# Altium PCB PCB2.PcbDoc
Units mm, origin at the board's own origin, x right, y up, seen from the top; angles counter-clockwise.
Board outline 102.36 x 81.91 mm, 2 copper layers (Top Layer, Bottom Layer); 10 components, 30 nets, 158 pads, 0 vias.
Unrouted connection lines stored in the file: 30.
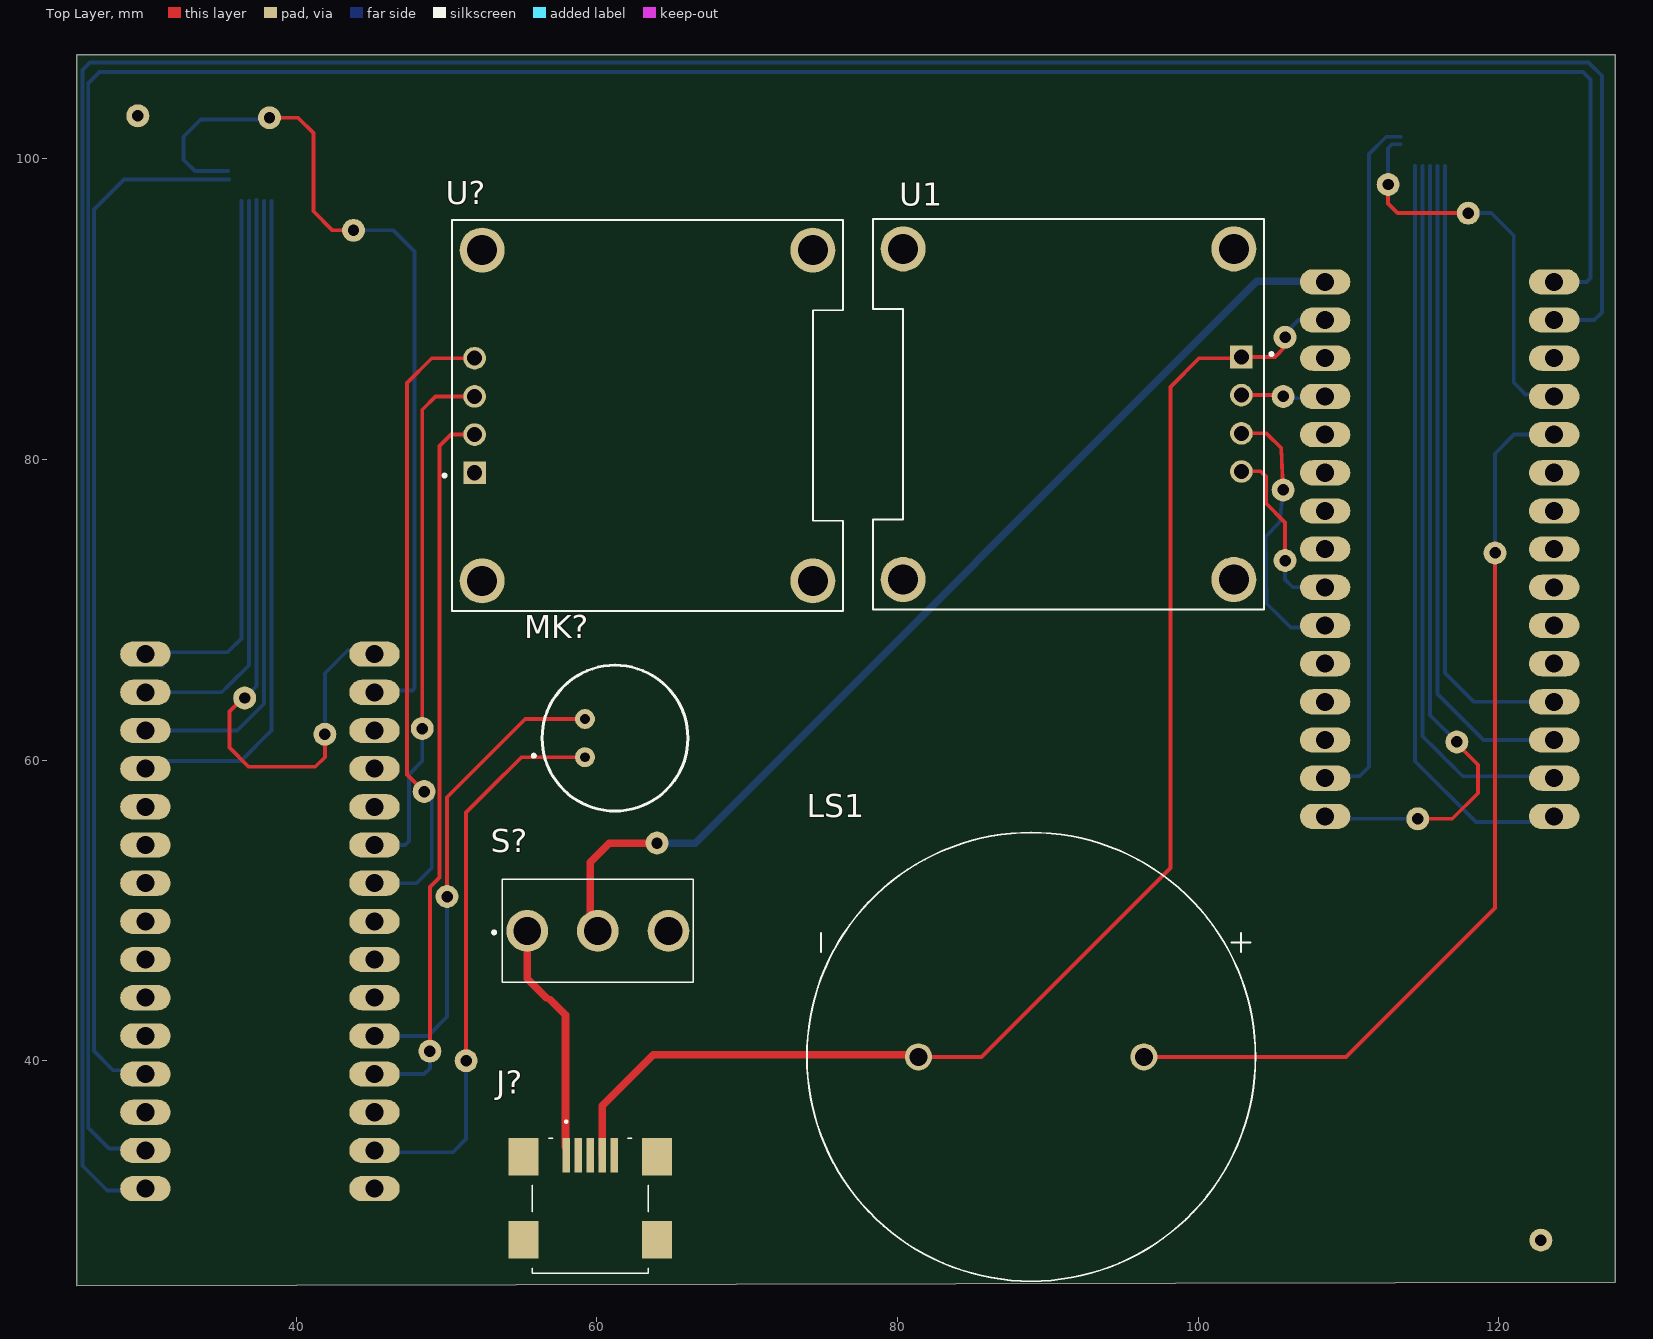
[diagram p0: Top Layer view]
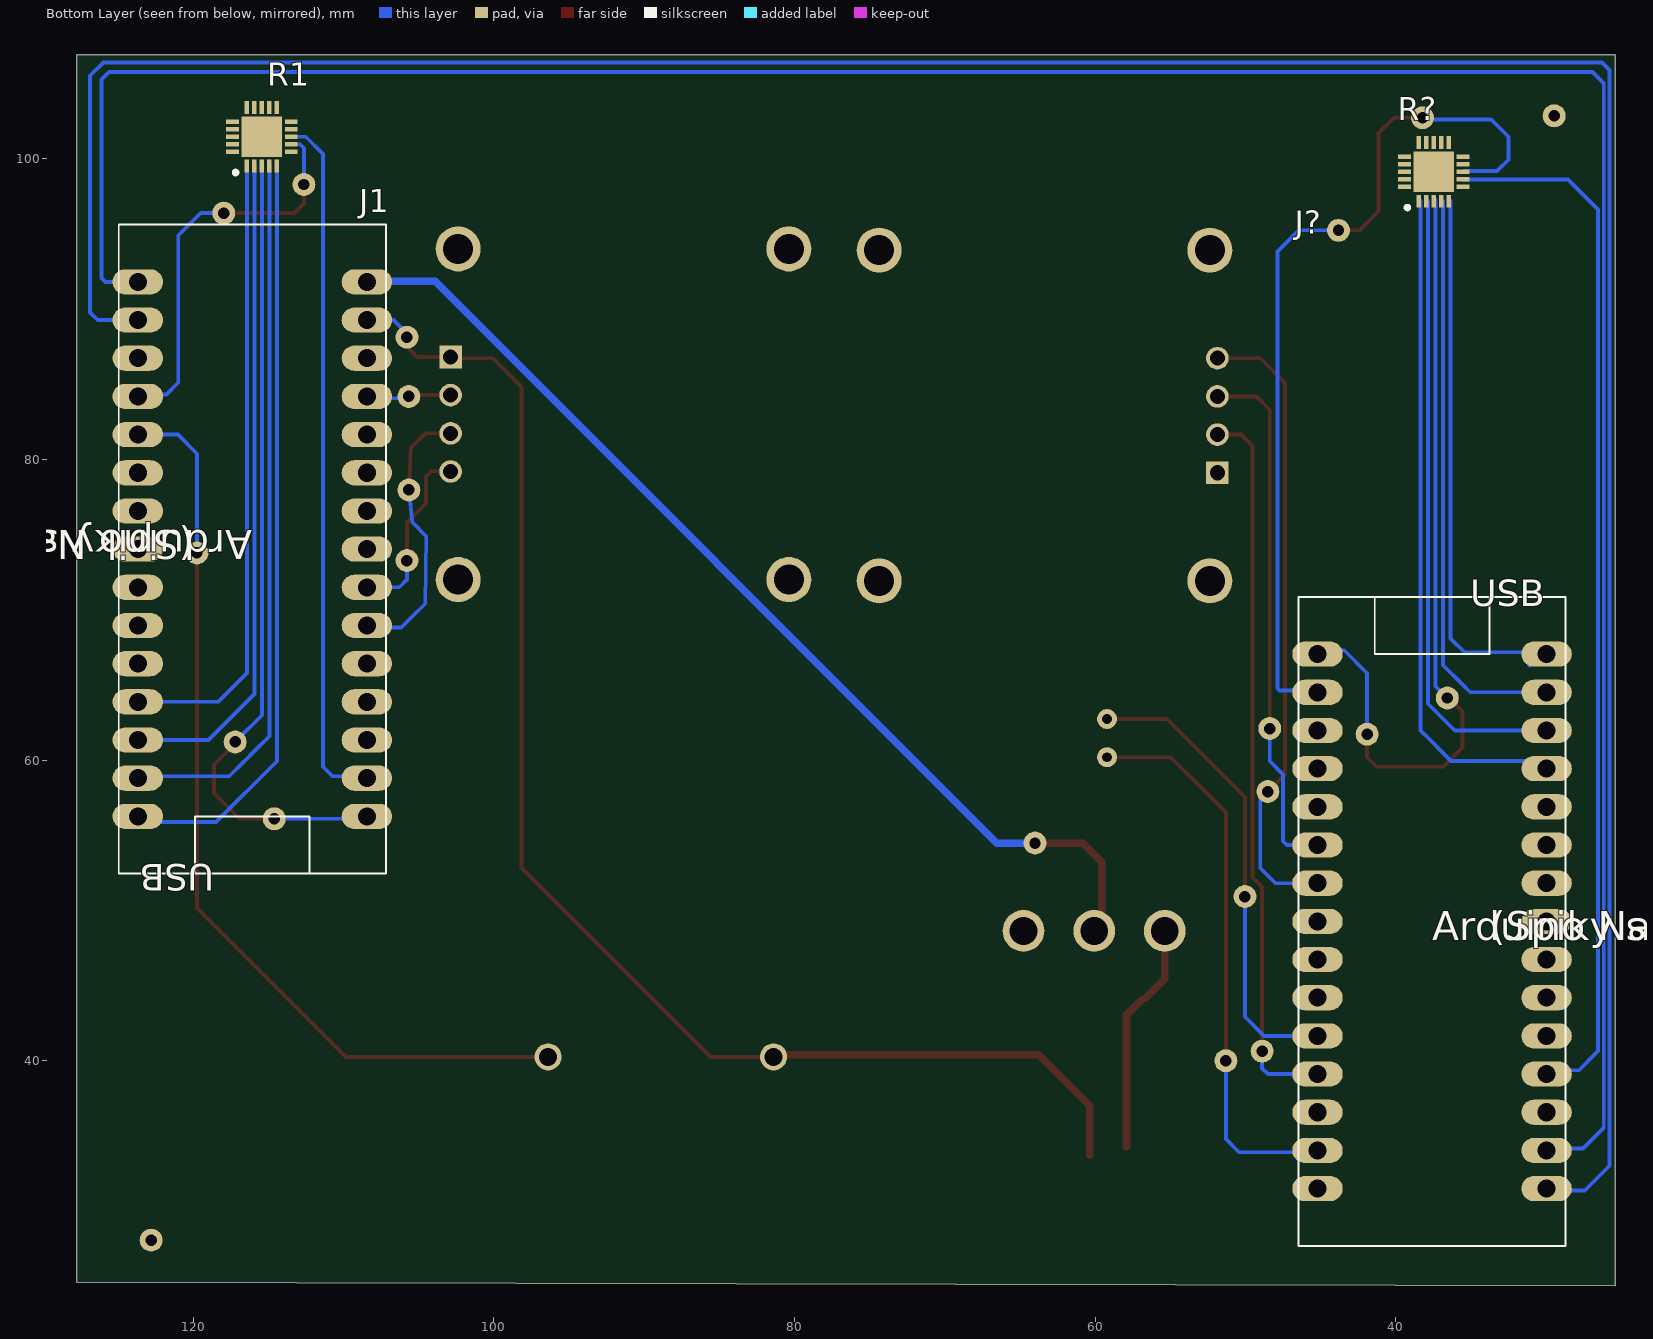
[diagram p1: Bottom Layer view, seen from below]

## Layer stack, top to bottom
Top Solder: solder mask 0.0102, Solder Resist, Dk 3.5
Top Layer: signal copper 0.0356
Dielectric 1: dielectric 0.32, FR-4, Dk 4.8
Bottom Layer: signal copper 0.0356
Bottom Solder: solder mask 0.0102, Solder Resist, Dk 3.5

## Board outline
25.4,25.019 127.762,25.273 127.762,26.035 127.762,106.934 26.416,106.934 25.4,106.934

## Design rules (kind name [scope] priority, off if disabled: settings)
Clearance [All] p1: gap=0.254 ignorepadtopadclearanceinfootprint=FALSE
PolygonConnect [All] p1: connectstyle=Relief reliefconductorwidth=0.254 reliefentries=4 polygonreliefangle="90 Angle" airgapwidth=0.254
RoutingVias [All] p1: holewidth=0.711 width=1.27 viastyle="Through Hole" minholewidth=0.711 minwidth=1.27 maxholewidth=0.711 maxwidth=1.27
SolderMaskExpansion [All] p1: expansion=0.102 istentingtop=FALSE
Width [All] p1: maxlimit=0.254 minlimit=0.254 preferedwidth=0.254
30 further rules are at their usual default settings.

## Classes and differential pairs
component class bogdob: J? MK? R? U?
component class ,julj,: J1 J? LS1 R1 S? U1

## Components (designator, comment, footprint, x,y, rotation, side; value= is the part's Value field where it differs from the comment)
J1 "ARDUINONANO" PDIP-32 116.078,52.451 r0 bottom
J? "1-1734035-1" 117340351 59.563,30.353 r90 top
J? "ARDUINONANO" PDIP-32 37.592,70.866 r180 bottom
LS1 "AST-03008MR-R" SPKR_AST-03008MR-R 88.9,40.259 r270 top
MK? "CMA-4544PF-W" CMA4544PFW 59.214,60.198 r180 top
R1 "nRF24L01P-T" QFN50P400X400X95-21N-D 115.443,101.473 r90 bottom
R? "nRF24L01P-T" QFN50P400X400X95-21N-D 37.481,99.142 r90 bottom
S? "100SP1T1B4M2QE" 100SP1T1B4M2QE 60.071,48.641 r0 top
U1 "DM-OLED096-636" MODULE_DM-OLED096-636 91.386,83.015 r270 top
U? "DM-OLED096-636" MODULE_DM-OLED096-636 63.373,82.931 r90 top

## Footprints (in the part's own frame and the unit in brackets; to place one, negate y for a bottom-side part, rotate by r counter-clockwise, add the part's x,y. Pads: shape width x height; smd on the part's side, far side on the other; paste and mask are expansions set on the pad)
100SP1T1B4M2QE [mm]
  round 2.775 hole 1.85: 1(-4.7,0) 2(0,0) 3(4.7,0)
  silkscreen extent -7,-3.43 6.35,3.43, body extent -6.35,-3.43 6.35,3.43, height 28.83
117340351 [mm]
  rect 2.3x0.5 smd: 1(3.35,1.6) 2(3.35,0.8) 3(3.35,0) 4(3.35,-0.8) 5(3.35,-1.6)
  rect 2.5x2 smd: MP1(3.25,4.45) MP2(3.25,-4.45) MP3(-2.25,4.45) MP4(-2.25,-4.45)
  silkscreen extent -4.5,-3.85 5.65,3.85, body extent -5.23,-4.95 3.97,4.95, height 4.14
CMA4544PFW [mm]
  round 1.333 hole 0.65: 1(0,0) 2(0,-2.54)
  silkscreen extent -6.85,-6.12 3.5,3.58, body extent -6.87,-6.08 2.83,3.62, height 4.17
MODULE_DM-OLED096-636 [mm]
  rect 1.508x1.508 / inner round 1.508 / far side rect 1.508x1.508 hole 1: 1(-3.81,11.5)
  round 1.508 hole 1: 2(-1.27,11.5) 3(1.27,11.5) 4(3.81,11.5)
  round 3 hole 2: S1(-11,11) S2(11,11) S3(11,-11) S4(-11,-11)
  silkscreen extent -13,-13 13,13.6, body extent -13,-13 13,13, height 5.66
PDIP-32 [mil]
  oval 132x66 hole 47.24: 3V3(-300,-250) +5V(-300,-1250) A0(-300,-1150) A1(-300,-1050) A2(-300,-950) A3(-300,-850) A4(-300,-750) A5(-300,-650) A6(-300,-550) A7(-300,-450) AREF(-300,-350) D0/RX(300,-1450) D1/TX(300,-1550) D2(300,-1150) D3(300,-1050) D4(300,-950) D5(300,-850) D6(300,-750) D7(300,-650) D8(300,-550) D9(300,-450) D10(300,-350) D11(300,-250) D12(300,-150) D13(-300,-150) GND(300,-1250) GND1(-300,-1450) RESET(300,-1350) RESET1(-300,-1350) VIN(-300,-1550)
  silkscreen extent -350,-1700 350,0, body extent -354,-850 354,921, height 496
QFN50P400X400X95-21N-D [mm]
  rect 0.85x0.3 smd: 1(-1.95,1) 2(-1.95,0.5) 3(-1.95,0) 4(-1.95,-0.5) 5(-1.95,-1) 11(1.95,-1) 12(1.95,-0.5) 13(1.95,0) 14(1.95,0.5) 15(1.95,1)
  rect 0.3x0.85 smd: 6(-1,-1.95) 7(-0.5,-1.95) 8(0,-1.95) 9(0.5,-1.95) 10(1,-1.95) 16(1,1.95) 17(0.5,1.95) 18(0,1.95) 19(-0.5,1.95) 20(-1,1.95)
  rect 2.7x2.7 smd: 21(0,0)
  silkscreen extent -2.5,1.63 -2.25,1.88, body extent -2.05,-2.05 2.05,2.05, height 0.95
SPKR_AST-03008MR-R [mm]
  round 1.8 hole 1.2: N(0,-7.5) P(0,7.5)
  silkscreen extent -14.92,-14.92 14.92,14.92, body extent -14.92,-14.92 14.92,14.92, height 11.5

## Part data
J1 J?: "NINA-W102, RP2040 Arduino Nano RP2040 Connect with Headers series ARMÂ® CortexÂ®-M0+ MCU 32-Bit Embedded Evaluation Board", Package="Non-Standard Arduino", Availability="Not in stock", Check_prices=https://www.snapeda.com/parts/ARDUINONANO/Arduino/view-part/?ref=eda, MF=Arduino, MP=ARDUINONANO, Price=None, SnapEDA_Link=https://www.snapeda.com/parts/ARDUINONANO/Arduino/view-part/?ref=snap
J?: "Connector", Manufacturer_Name="TE Connectivity", Mouser Part Number=571-1-1734035-1, Arrow Part Number=1-1734035-1, Arrow Price/Stock=https://www.arrow.com/en/products/1-1734035-1/te-connectivity?region=nac, Datasheet Link=https://www.te.com/commerce/DocumentDelivery/DDEController?Action=showdoc&DocId=Customer+Drawing%7F1734035%7FF%7Fpdf%7FEnglish%7FENG_CD_1734035_F.pdf%7F1-1734035-1, Height=4.14mm, Manufacturer_Part_Number=1-1734035-1, Mouser Price/Stock=https://www.mouser.co.uk/ProductDetail/TE-Connectivity/1-1734035-1?qs=x6EjVpvqMVOdSE4jVN5kww%3D%3D
LS1: "SPEAKER .15W 8OHM 72DB 1400HZ", Package=None, Check_prices=https://www.snapeda.com/parts/AST-03008MR-R/PUI+Audio%252C+Inc./view-part/?ref=eda, MF="PUI Audio", MP=AST-03008MR-R, SnapEDA_Link=https://www.snapeda.com/parts/AST-03008MR-R/PUI+Audio%252C+Inc./view-part/?ref=snap
MK?: "Microphone", Manufacturer_Name="CUI Devices", Mouser Part Number=490-CMA-4544PF-W, Arrow Part Number=CMA-4544PF-W, Arrow Price/Stock=https://www.arrow.com/en/products/cma-4544pf-w/cui-devices?region=nac, Datasheet Link=https://www.cuidevices.com/product/resource/cma-4544pf-w.pdf, Height=4.65mm, Manufacturer_Part_Number=CMA-4544PF-W, Mouser Price/Stock=https://www.mouser.co.uk/ProductDetail/CUI-Devices/CMA-4544PF-W?qs=WyjlAZoYn50RZRL7clQhww%3D%3D
R1 R?: "Integrated Circuit", Arrow Part Number=NRF24L01P-T, Manufacturer_Name="Nordic Semiconductor", Mouser Part Number=949-NRF24L01P-T, Arrow Price/Stock=null?region=nac, Datasheet Link=https://datasheet.datasheetarchive.com/originals/distributors/Datasheets-DGA19/4322.pdf, Height=0.95mm, Manufacturer_Part_Number=nRF24L01P-T, Mouser Price/Stock=https://www.mouser.co.uk/ProductDetail/Nordic-Semiconductor/nRF24L01P-T?qs=yd0qOhnSiDf9ybbDsku6vg%3D%3D
S?: "Switch", Manufacturer_Name=E-Switch, Mouser Part Number=612-100-A1421, Datasheet Link=https://configured-product-images.s3.amazonaws.com/2D/specs/100SP1T1B4M2QE.pdf, Height=28mm, Manufacturer_Part_Number=100SP1T1B4M2QE, Mouser Price/Stock=https://www.mouser.co.uk/ProductDetail/E-Switch/100SP1T1B4M2QE?qs=YXf4ACKMM4xJ0mJK%2FyIa1g%3D%3D
U1 U?: "0.96â€ 128 X 64 MONOCHROME GRAPHIC OLED DISPLAY MODULE - I2C", Package=Package, Check_prices=https://www.snapeda.com/parts/DM-OLED096-636/Display+Module/view-part/?ref=eda, MF="Display Module", MP=DM-OLED096-636, SnapEDA_Link=https://www.snapeda.com/parts/DM-OLED096-636/Display+Module/view-part/?ref=snap

## Free pads (board coordinates)
  round 1.524 hole 0.762: 8(43.815,95.25) 10(38.227,102.743) 11(36.576,64.135) 12(41.91,61.722) 14(117.221,61.214) 15(114.621,56.098) 16(112.649,98.298) 17(117.98,96.393) 18(105.791,88.138) 19(105.664,84.201) 21(105.664,77.978) 23(51.308,40.005) 24(50.038,50.927) 25(48.895,40.64) 26(48.514,57.912) 27(48.387,62.103) 28(48.387,62.103) 29(105.791,73.279) 30(119.761,73.787) 31(119.761,73.787) 32(64.008,54.483) 33(64.008,54.483) 34(29.464,102.87) 35(122.809,28.067)

## Nets (pads, with @x,y where several pads share a name; then routed paths per layer and width w, separated by ;. In a path a pad name is that pad's centre, name@x,y a point inside that pad or via, vN(x,y) a via of type N, cw(c..) or ccw(c..) an arc to the next point about the centre after c; other vN are vias at no path point)
NetJ1_3V3: J1.3V3 R1.8
NetJ1_+5V: J1.+5V U1.2
NetJ1_A4: J1.A4 U1.4
NetJ1_A5: J1.A5 U1.3
NetJ1_D0/RX: J1.D0/RX
NetJ1_D1/TX: J1.D1/TX
NetJ1_D2: J1.D2 LS1.P
NetJ1_D9: J1.D9 R1.1
NetJ1_D10: J1.D10 R1.2
NetJ1_D11: J1.D11 R1.4
NetJ1_D12: J1.D12 R1.5
NetJ1_D13: J1.D13 R1.3 | length 35.8
  Bottom Layer w0.254: 115.443,63.754 R1.3
NetJ1_GND: J1.GND R1.7
NetJ1_GND1: J1.GND1 J?.4 LS1.N U1.1
NetJ1_VIN: J1.VIN S?.1
NetJ?_1: J?.1 S?.2 | length 4.7
  Top Layer w0.254: 55.245,48.006 55.118,48.133 55.372,47.879
  Top Layer w0.5: 55.372,47.879 55.372,45.466 56.642,44.196
NetJ?_3V3: J?.3V3 R?.8
NetJ?_+5V: J?.+5V U?.2
NetJ?_A0: J?.A0 MK?.2 | length 31.5
  Top Layer w0.254: 50.038,50.927 50.038,57.531 55.245,62.738 MK?.2
  Bottom Layer w0.254: J?.A0@45.339,41.783 J?.A0 48.768,41.656 50.038,42.926 50.038,50.927
NetJ?_A4: J?.A4 U?.4
NetJ?_A5: J?.A5 U?.3
NetJ?_D0/RX: J?.D0/RX
NetJ?_D1/TX: J?.D1/TX
NetJ?_D9: J?.D9 R?.1
NetJ?_D10: J?.D10 R?.2
NetJ?_D11: J?.D11 R?.4
NetJ?_D12: J?.D12 R?.5
NetJ?_D13: J?.D13 R?.3
NetJ?_GND: J?.GND R?.7
NetJ?_GND1: J?.GND1 MK?.1 U?.1 | length 37.2
  Top Layer w0.254: 51.308,40.005 51.308,56.515 52.84,58.047 54.991,60.198 MK?.1
  Bottom Layer w0.254: J?.GND1@45.593,33.909 50.419,33.909 51.308,34.798 51.308,40.005
pads on no net: J1.A0 J1.A1 J1.A2 J1.A3 J1.A6 J1.A7 J1.AREF J1.D3 J1.D4 J1.D5 J1.D6 J1.D7 J1.D8 J1.RESET J1.RESET1 J?.2 J?.3 J?.5 J?.A1 J?.A2 J?.A3 J?.A6 J?.A7 J?.AREF J?.D2 J?.D3 J?.D4 J?.D5 J?.D6 J?.D7 J?.D8 J?.MP1 J?.MP2 J?.MP3 J?.MP4 J?.RESET J?.RESET1 J?.VIN R1.6 R1.9 R1.10 R1.11 R1.12 R1.13 R1.14 R1.15 R1.16 R1.17 R1.18 R1.19 R1.20 R1.21 R?.6 R?.9 R?.10 R?.11 R?.12 R?.13 R?.14 R?.15 R?.16 R?.17 R?.18 R?.19 R?.20 R?.21 S?.3 U1.S1 U1.S2 U1.S3 U1.S4 U?.S1 U?.S2 U?.S3 U?.S4
copper on no net: | length 1403.8
  Top Layer w0.254: 36.576,64.135 36.449,64.135 35.56,63.246 35.56,60.833 36.83,59.563 41.275,59.563 41.91,60.198 41.91,61.722 ; 38.227,102.743 40.132,102.743 41.148,101.727 41.148,96.52 42.418,95.25 43.815,95.25 ; 48.387,62.103 48.387,83.312 49.276,84.201 50.165,84.201 51.873,84.201 ; 48.895,40.64 48.895,41.275 48.895,51.562 49.53,52.197 49.53,57.141 49.53,57.912 49.53,80.899 50.292,81.661 51.873,81.661 ; 48.895,57.776 48.514,57.912 47.371,59.055 47.371,60.706 47.371,85.09 49.022,86.741 51.873,86.741 ; 57.912,34.163 57.912,34.29 ; 80.899,40.386 81.28,40.767 82.042,40.767 ; 81.4,40.259 85.598,40.259 98.171,52.832 98.171,84.836 100.076,86.741 102.802,86.741 102.886,86.825 105.113,86.825 105.791,87.503 105.791,88.138 ; 96.4,40.259 109.855,40.259 119.761,50.165 119.761,73.025 119.761,73.787 ; 102.842,79.248 102.886,79.205 ; 102.864,79.226 104.162,79.226 104.521,78.867 104.521,77.089 105.791,75.819 105.791,73.279 ; 102.886,81.745 104.564,81.745 105.537,80.772 105.664,77.978 ; 102.886,84.285 105.58,84.285 105.664,84.201 ; 112.649,98.298 112.649,97.028 113.284,96.393 117.475,96.393 117.983,96.393 117.98,96.393 ; 114.621,56.098 116.917,56.098 118.618,57.799 118.618,59.69 117.221,61.087 117.221,61.214
  Top Layer w0.5: 56.896,44.069 57.912,43.053 ; 59.563,48.514 59.563,53.213 60.833,54.483 64.008,54.483 ; 60.363,33.703 60.363,36.995 63.754,40.386 72.517,40.386 79.121,40.386 80.899,40.386
  Top Layer w0.54: 57.912,34.29 57.912,43.053
  Bottom Layer w0.254: 29.21,31.369 27.432,31.369 25.781,33.02 25.781,105.918 26.289,106.426 125.984,106.426 126.873,105.537 126.873,89.789 126.365,89.281 123.698,89.281 ; 29.972,34.036 29.845,34.163 27.559,34.163 26.162,35.56 26.162,105.029 26.924,105.791 125.603,105.791 126.111,105.283 126.111,92.075 125.857,91.821 123.952,91.821 ; 29.972,59.436 30.099,59.563 ; 29.972,64.516 32.512,64.516 33.401,64.516 34.163,64.516 35.052,64.516 35.56,65.024 36.854,66.318 36.854,97.192 ; 29.972,67.056 30.099,67.183 35.433,67.183 36.354,68.104 36.354,97.192 ; 30.226,61.976 33.401,61.976 36.076,61.976 37.854,63.754 37.854,97.192 ; 30.226,67.183 30.353,67.31 30.353,66.548 31.115,67.31 31.115,66.294 ; 30.734,59.563 31.115,59.944 36.322,59.944 36.83,60.452 37.846,61.468 38.354,61.976 38.354,97.192 ; 30.988,39.37 27.813,39.37 26.543,40.64 26.543,96.647 28.538,98.642 34.073,98.642 35.531,98.642 ; 35.486,99.187 33.274,99.187 32.512,99.949 32.512,101.473 33.655,102.616 37.973,102.616 ; 36.576,64.135 37.354,64.913 37.354,97.282 ; 41.91,61.722 41.91,65.786 43.434,67.31 44.45,67.31 ; 43.815,95.25 46.482,95.25 47.879,93.853 47.879,67.945 47.879,66.167 47.879,65.066 47.879,64.792 47.73,64.643 45.72,64.643 ; 45.212,39.116 48.514,39.116 48.895,39.497 48.895,40.64 ; 45.212,51.816 47.371,51.816 48.006,51.816 49.022,52.832 49.022,53.467 49.022,56.261 49.022,57.404 48.514,57.912 ; 45.212,54.356 47.244,54.356 47.498,54.61 47.498,59.055 48.387,59.944 48.387,62.103 ; 105.664,77.978 105.442,75.851 104.505,74.885 104.571,70.406 105.537,69.469 106.172,68.834 107.95,68.834 ; 105.664,84.201 105.791,84.074 108.712,84.074 ; 105.791,73.279 105.791,72.009 106.299,71.501 106.553,71.501 108.458,71.501 ; 105.791,88.138 105.791,88.392 106.68,89.281 107.95,89.281 ; 108.458,58.801 108.585,58.928 110.744,58.928 111.379,59.563 111.379,100.33 112.522,101.473 113.493,101.473 ; 109.256,56.098 114.621,56.098 ; 112.649,98.298 112.649,100.711 112.911,100.973 113.493,100.973 ; 114.443,99.523 114.443,59.928 118.491,55.88 124.079,55.88 ; 114.943,99.523 114.943,62.857 114.943,61.587 115.925,60.605 116.62,59.91 116.636,59.91 117.619,58.928 118.872,58.928 123.063,58.928 ; 115.943,99.523 115.943,64.397 118.999,61.341 123.317,61.341 ; 116.443,99.523 116.443,65.802 118.364,63.881 123.698,63.881 ; 117.221,61.214 115.443,62.992 ; 117.98,96.393 119.507,96.393 121.004,94.896 121.004,85.117 121.793,84.328 122.936,84.328 ; 119.761,73.787 119.761,80.391 121.031,81.661 123.698,81.661 ; 115.443,62.992 115.443,63.5 ; 115.443,62.992 115.443,63.5 ; 115.443,63.5 115.443,63.627 ; 115.443,63.5 115.443,63.627 ; 115.443,63.627 115.443,63.754 115.443,63.627
  Bottom Layer w0.5: 64.008,54.483 66.548,54.483 103.923,91.858 105.246,91.858 107.913,91.858

## Text inside footprints (layer, text, board x,y; h text height)
J1: Bottom Overlay "USB" at 118.618,53.086 h1.78 r180; Bottom Overlay "Arduino Nano" at 116.078,75.311 h1.93 r180; Bottom Overlay "(Spiky side down)" at 119.939,75.311 h1.93 r180
J?: Bottom Overlay "USB" at 35.052,70.231 h1.78; Bottom Overlay "Arduino Nano" at 37.592,48.006 h1.93; Bottom Overlay "(Spiky side down)" at 33.731,48.006 h1.93